# Altium PCB XEM7310_Berakout.PcbDoc (part 1 of 3)
Units mil, origin at the board's own origin, x right, y up, seen from the top; angles counter-clockwise.
Board outline 5980 x 6510 mil, 4 copper layers (Top, Ground Plane, Power Plane, Bottom), stack 61.496 mil thick; 68 components, 204 nets, 832 pads, 382 vias.
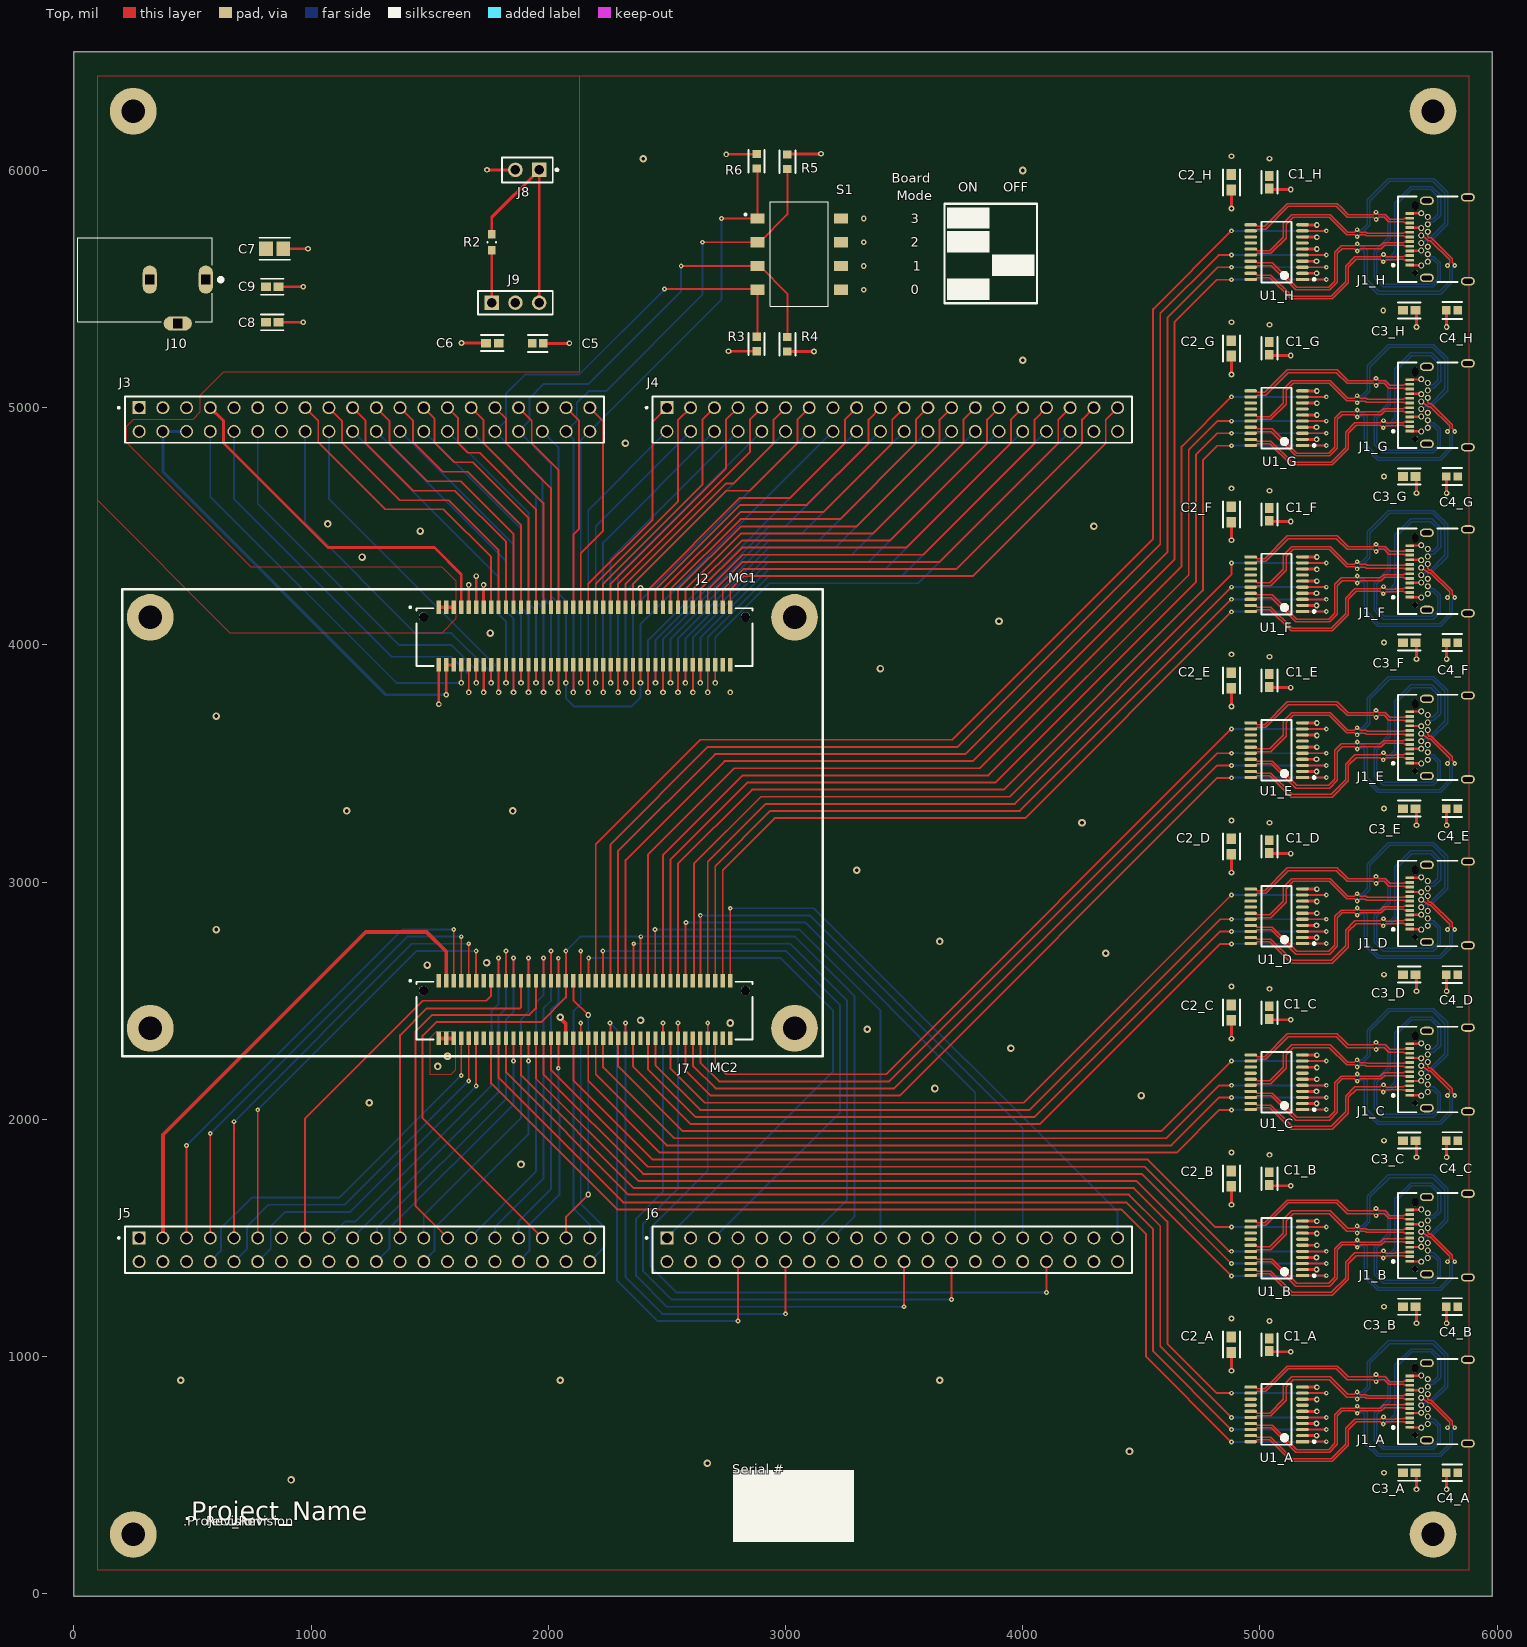
[diagram p0: Top view]
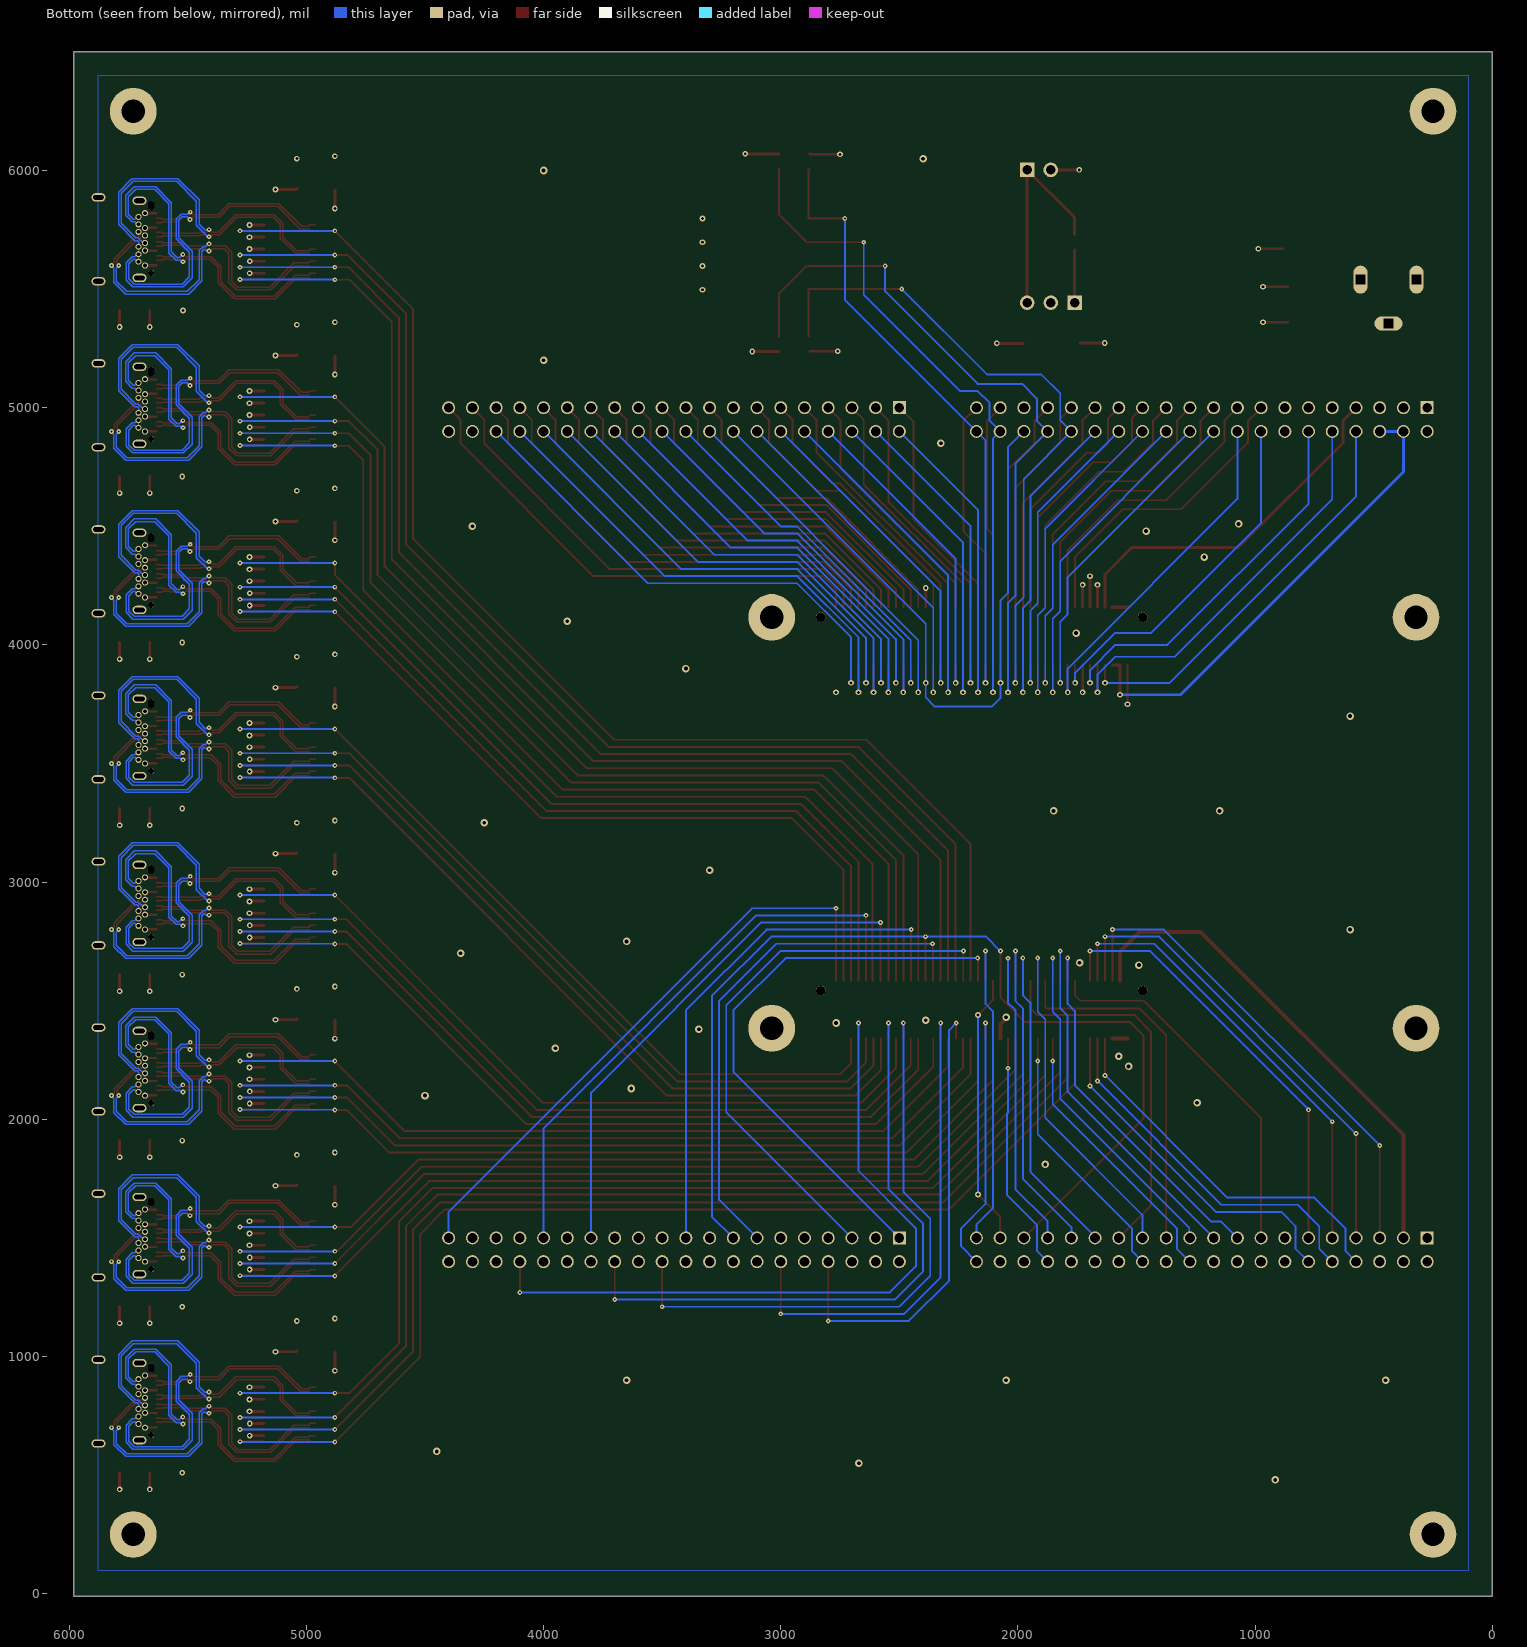
[diagram p1: Bottom view, seen from below]
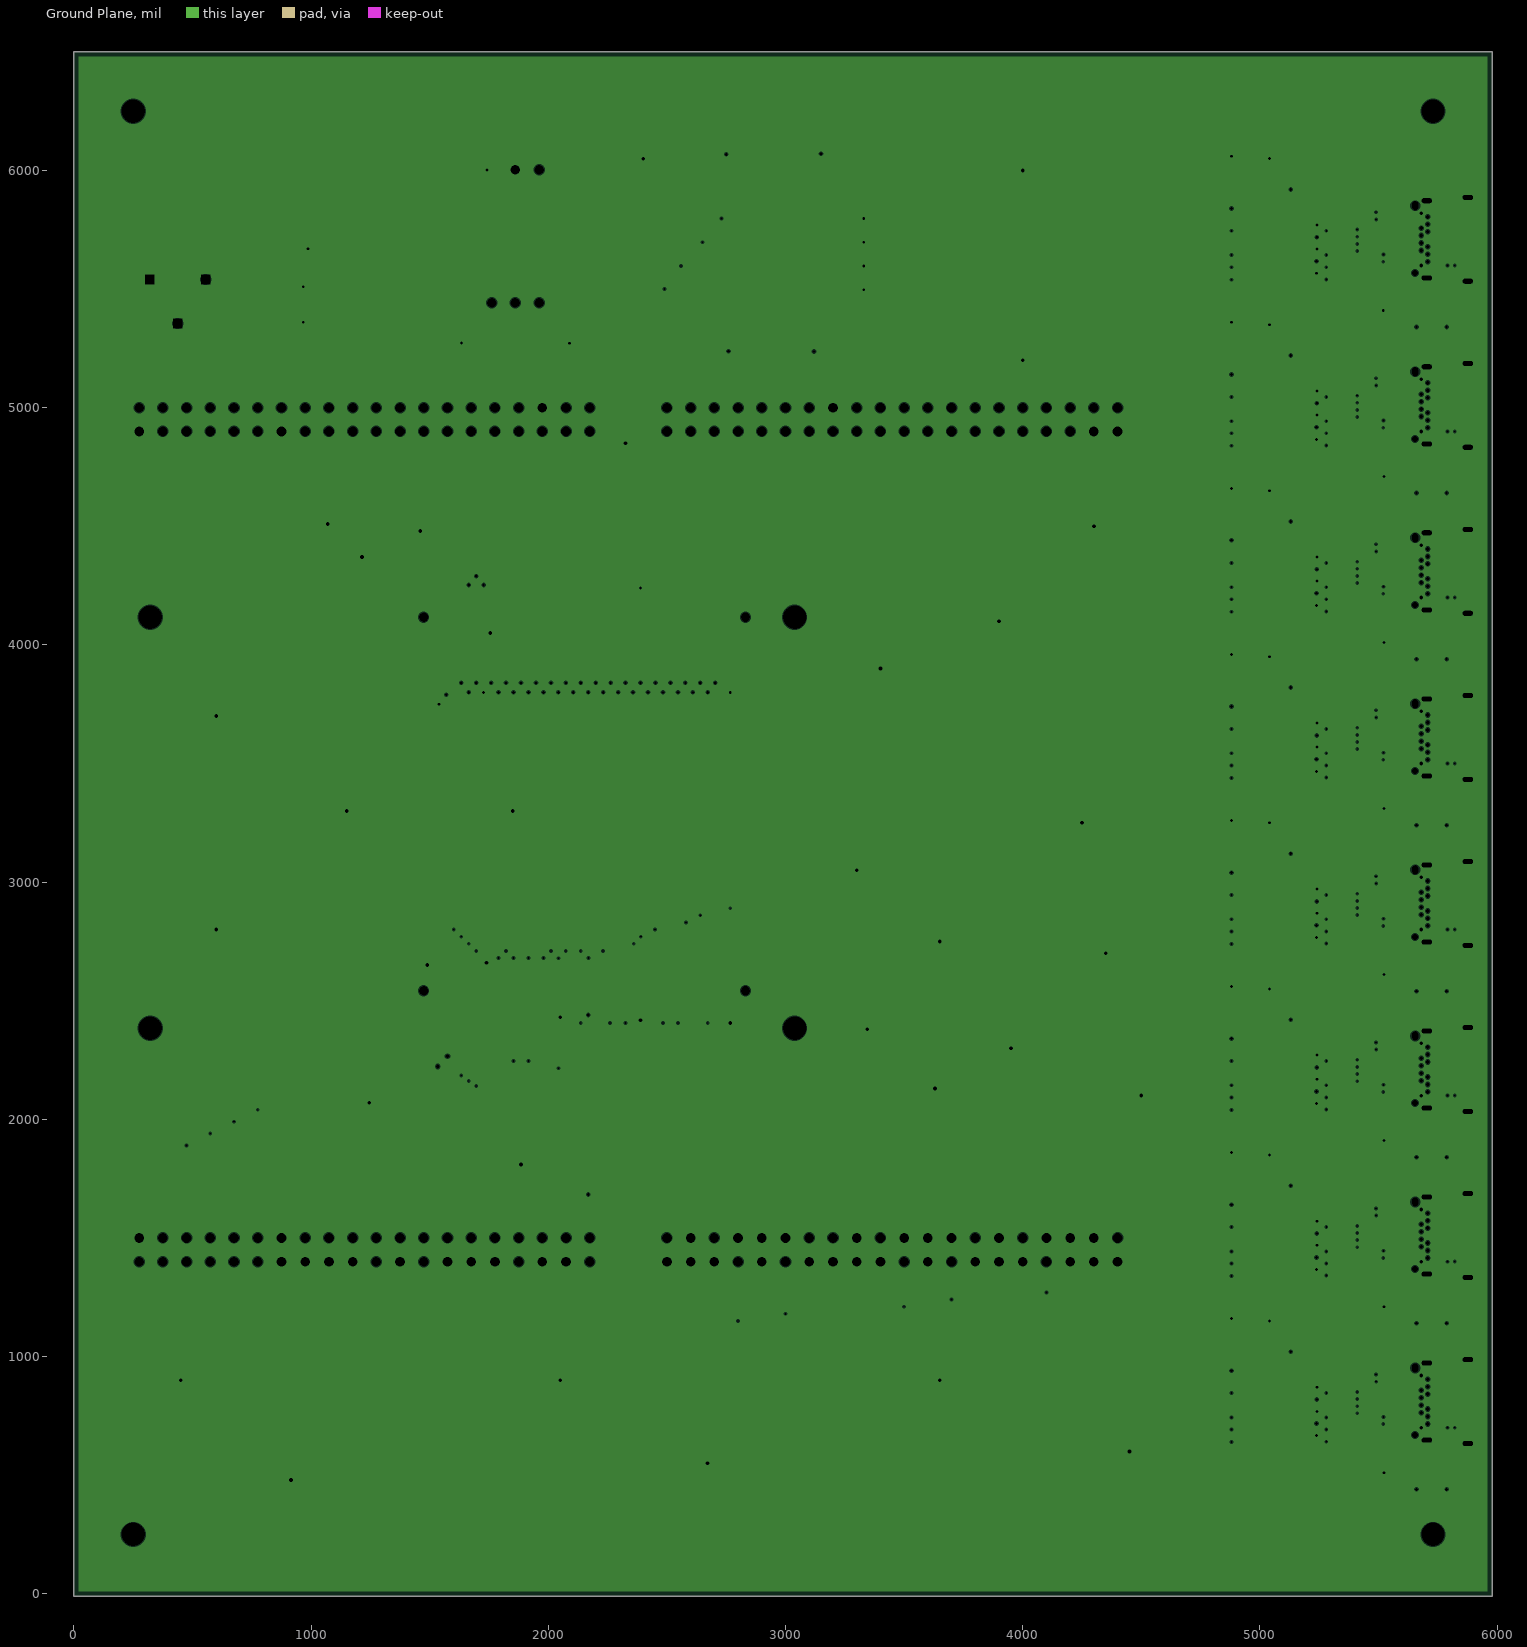
[diagram p2: Ground Plane, clearances drawn from the general rule]
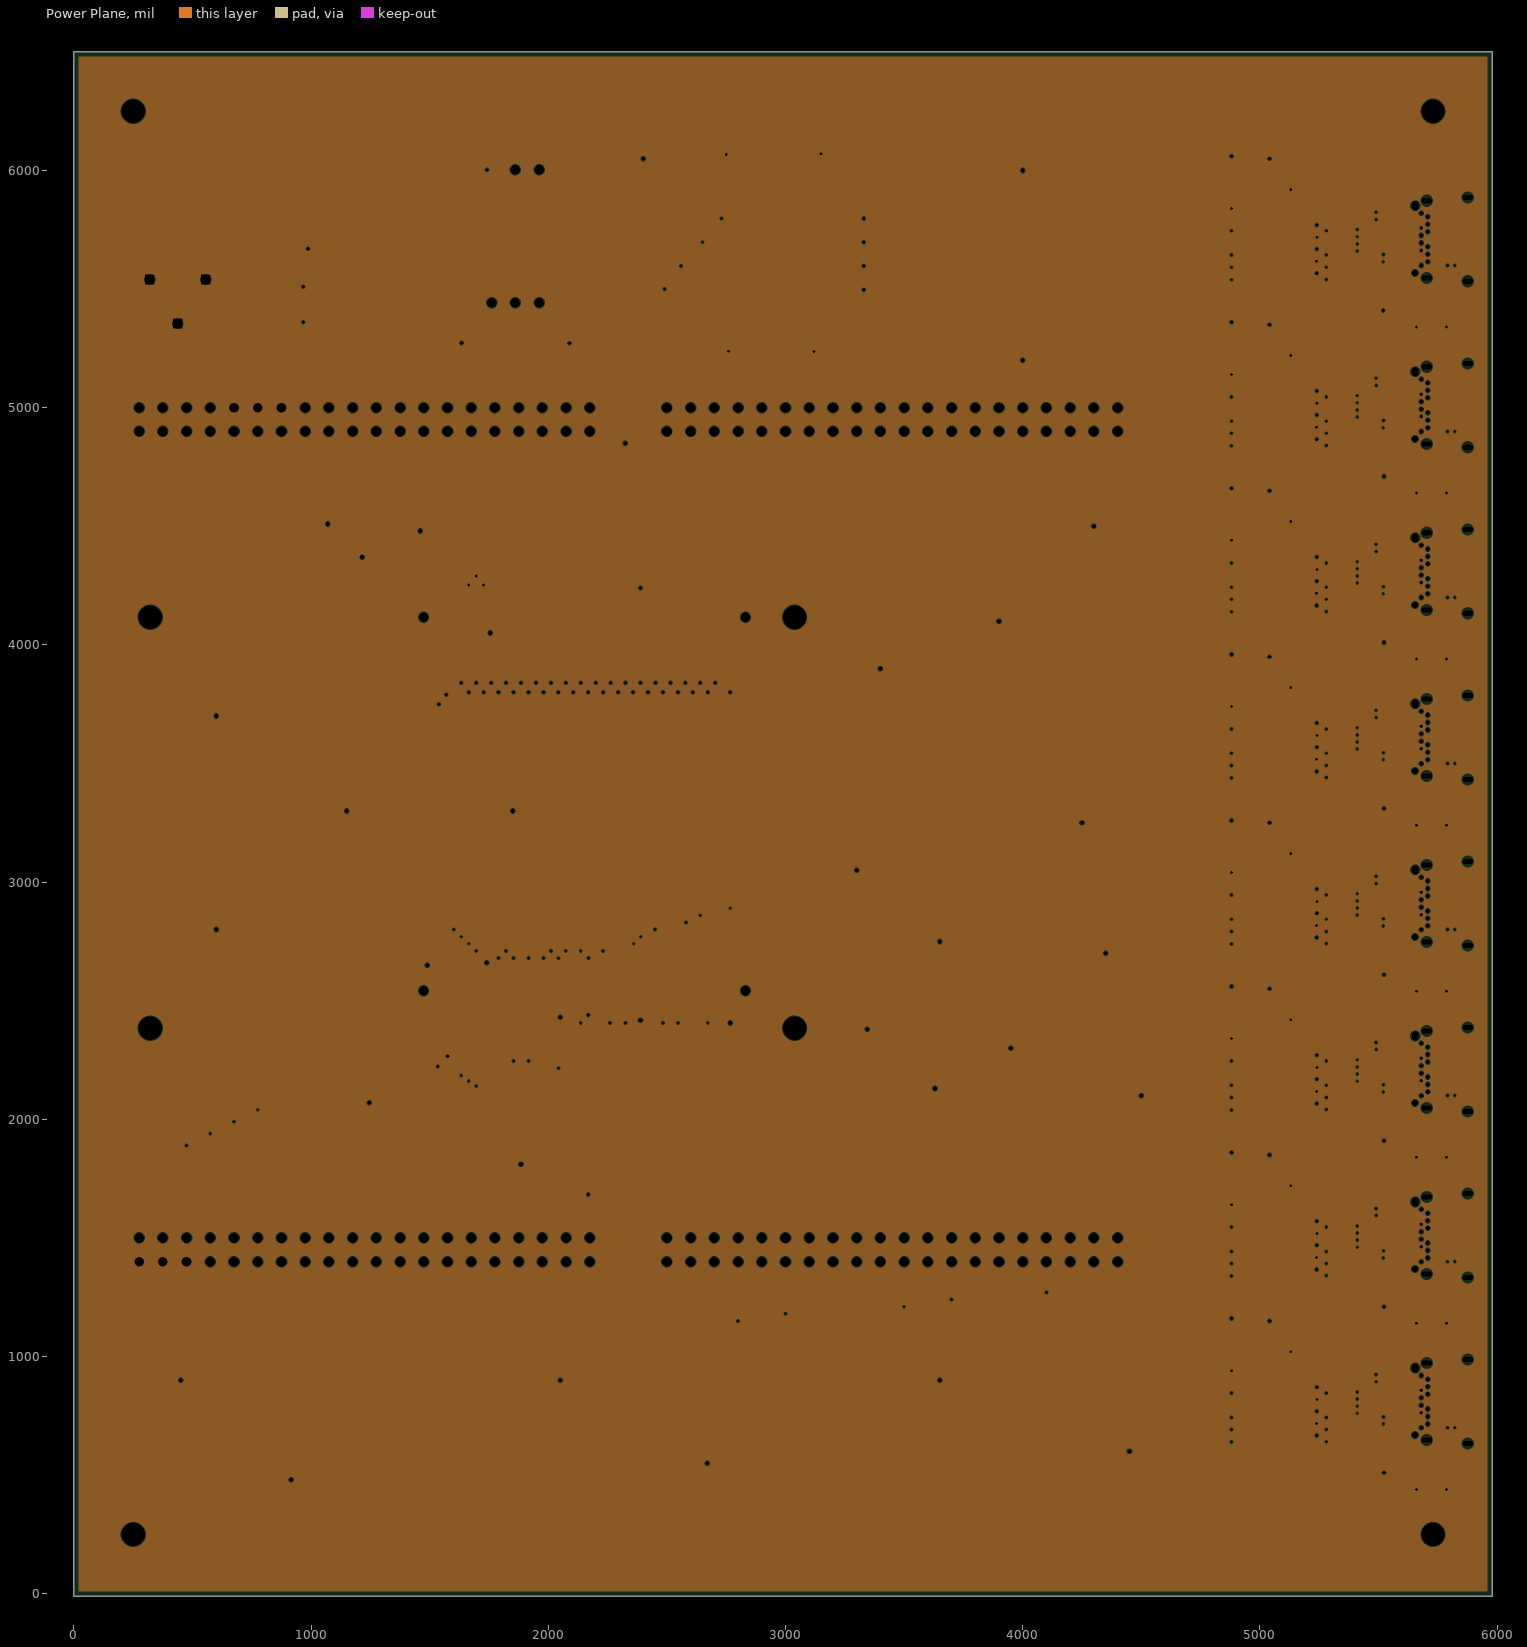
[diagram p3: Power Plane, clearances drawn from the general rule]

## Layer stack, top to bottom
Top Solder: solder mask 0.4, Solder Resist, Dk 3.5
Top: signal copper 1.378
Dielectric 1: prepreg 7.7165, FR-4, Dk 4.74
Ground Plane: plane copper 1.378, net GND
Dielectric 3: core 40.5512, Dk 4.6
Power Plane: plane copper 1.378, net 3V3
Dielectric 4: prepreg 7.7165, Dk 4.74
Bottom: signal copper 1.378
Bottom Solder: solder mask 0.4, Solder Resist, Dk 3.5

## Board outline
0,6500 5980,6500 5980,-10 0,-10

## Design rules (kind name [scope] priority, off if disabled: settings)
AssemblyTestPointUsage [All] p0: scope1count=1 scope1_0_kind=Board scope1_0_value=Board scope2count=1 scope2_0_kind=Board scope2_0_value=Board commentlength=0
AssemblyTestpoint [All] p0: scope1count=1 scope1_0_kind=Board scope1_0_value=Board scope2count=1 scope2_0_kind=Board scope2_0_value=Board commentlength=0
BoardOutlineClearance [All] p0: scope1count=1 scope1_0_kind=Board scope1_0_value=Board scope2count=1 scope2_0_kind=Board scope2_0_value=Board commentlength=0 gap=7.87
BoardOutlineClearance [All] p1: gap=7.87 ignorepadtopadclearanceinfootprint=FALSE
Clearance Clearance_1 [All] p0: scope1count=1 scope1_0_kind=ComponentClass scope1_0_value=USB scope2count=1 scope2_0_kind=ComponentClass scope2_0_value=USB commentlength=0 gap=4
Clearance Diff_Clearance [All] p0 off: scope1count=1 scope1_0_kind=Board scope1_0_value=Board scope2count=1 scope2_0_kind=Board scope2_0_value=Board commentlength=74 gap=10 // Protel DXP Scope 2 Expression Was: InDifferentialPairClass('LVDS_SPI')
Clearance [All] p0: scope1count=1 scope1_0_kind=Board scope1_0_value=Board scope2count=1 scope2_0_kind=Board scope2_0_value=Board commentlength=0 gap=6
Clearance Clearance_1 [InComponentClass('USB') vs InComponentClass('USB')] p1: gap=4 ignorepadtopadclearanceinfootprint=TRUE
Clearance Diff_Clearance [InDifferentialPairClass('LVDS_SPI') vs InDifferentialPairClass('LVDS_SPI')] p2: gap=10 ignorepadtopadclearanceinfootprint=TRUE except(5: Arc-Arc Arc-Track Track-Track)
Clearance [All] p3: gap=6 ignorepadtopadclearanceinfootprint=TRUE except(10: Arc-Arc Arc-Track Arc-Fill Arc-Poly Arc-Region Track-Track Track-Fill Track-Poly Track-Region SMDPad-Fill SMDPad-Poly SMDPad-Region THPad-Fill THPad-Poly THPad-Region Via-Fill Via-Poly Via-Region Fill-Fill Fill-Poly Fill-Region Poly-Poly Poly-Region Region-Region)
ComponentClearance [All] p0: scope1count=1 scope1_0_kind=Board scope1_0_value=Board scope2count=1 scope2_0_kind=Board scope2_0_value=Board commentlength=0 gap=10 collisioncheckmode=3
ComponentClearance [All] p1: gap=10 collisioncheckmode=3 verticalgap=10 showdistances=TRUE
DiffPairsRouting [All] p0 off: scope1count=1 scope1_0_kind=Board scope1_0_value=Board scope2count=1 scope2_0_kind=Board scope2_0_value=Board commentlength=74 // Protel DXP Scope 1 Expression Was: InDifferentialPairClass('LVDS_SPI')
DiffPairsRouting [InDifferentialPairClass('LVDS_SPI')] p1: maxlimit=5 minlimit=5 mostfreqgap=5 toplayer_minwidth=6.3 toplayer_maxwidth=6.3 toplayer_prefwidth=6.3 bottomlayer_minwidth=6.3 bottomlayer_maxwidth=6.3 bottomlayer_prefwidth=6.3 impedanceprofiledriven=TRUE impedanceprofileid={1ED248B1-CE5C-4CD3-9082-4E048037D57D} impedanceprofilevalue=100.000000 maxuncoupledlength=30
FabricationTestPointUsage [All] p0: scope1count=1 scope1_0_kind=Board scope1_0_value=Board scope2count=1 scope2_0_kind=Board scope2_0_value=Board commentlength=0 valid=0 allowmultiple=FALSE
FabricationTestpoint [All] p0: scope1count=1 scope1_0_kind=Board scope1_0_value=Board scope2count=1 scope2_0_kind=Board scope2_0_value=Board commentlength=0 side=3 testpointundercomponent=TRUE minsize=40 maxsize=100 preferedsize=60 minholesize=0 maxholesize=40 preferedholesize=32 testpointgrid=1
FanoutControl Fanout_Default [All] p0: scope1count=1 scope1_0_kind=Board scope1_0_value=Board scope2count=1 scope2_0_kind=Board scope2_0_value=Board commentlength=30 // Fanout_Default (Default Rule)
FanoutControl Fanout_Small [All] p0 off: scope1count=1 scope1_0_kind=Board scope1_0_value=Board scope2count=1 scope2_0_kind=Board scope2_0_value=Board commentlength=84 // Protel DXP Scope 1 Expression Was: (CompPinCount < 5)   Fanout_Small (Default Rule)
FanoutControl Fanout_SOIC [All] p0 off: scope1count=1 scope1_0_kind=Board scope1_0_value=Board scope2count=1 scope2_0_kind=Board scope2_0_value=Board commentlength=71 // Protel DXP Scope 1 Expression Was: IsSOIC   Fanout_SOIC (Default Rule)
FanoutControl Fanout_LCC [All] p0 off: scope1count=1 scope1_0_kind=Board scope1_0_value=Board scope2count=1 scope2_0_kind=Board scope2_0_value=Board commentlength=69 // Protel DXP Scope 1 Expression Was: IsLCC   Fanout_LCC (Default Rule)
FanoutControl Fanout_BGA [All] p0 off: scope1count=1 scope1_0_kind=Board scope1_0_value=Board scope2count=1 scope2_0_kind=Board scope2_0_value=Board commentlength=69 // Protel DXP Scope 1 Expression Was: IsBGA   Fanout_BGA (Default Rule)
Height [All] p0: scope1count=1 scope1_0_kind=Board scope1_0_value=Board scope2count=1 scope2_0_kind=Board scope2_0_value=Board commentlength=0
Height [All] p1: minheight=0 maxheight=71497.94 prefheight=500
HoleSize [All] p0: scope1count=1 scope1_0_kind=Board scope1_0_value=Board scope2count=1 scope2_0_kind=Board scope2_0_value=Board commentlength=0 absolutevalues=TRUE maxlimit=248.03 minlimit=7.87 maxpercent=80.000 minpercent=20.000
HoleSize [All] p1: absolutevalues=TRUE maxlimit=248.03 minlimit=7.87 maxpercent=80.000 minpercent=20.000
HoleToHoleClearance [All] p0: scope1count=1 scope1_0_kind=Board scope1_0_value=Board scope2count=1 scope2_0_kind=Board scope2_0_value=Board commentlength=0
HoleToHoleClearance [All] p1: gap=10 allowstackedmicrovias=FALSE
LayerPairs [All] p0: scope1count=1 scope1_0_kind=Board scope1_0_value=Board scope2count=1 scope2_0_kind=Board scope2_0_value=Board commentlength=0 enforce=TRUE
Length [All] p0 off: scope1count=1 scope1_0_kind=Board scope1_0_value=Board scope2count=1 scope2_0_kind=Board scope2_0_value=Board commentlength=74 maxlimit=100000 minlimit=10 // Protel DXP Scope 1 Expression Was: InDifferentialPairClass('LVDS_SPI')
Length [InDifferentialPairClass('LVDS_SPI')] p1: maxlimit=100000 minlimit=10
MinimumAnnularRing USB_TH [All] p0: scope1count=1 scope1_0_kind=ComponentClass scope1_0_value=USB scope2count=1 scope2_0_kind=Board scope2_0_value=Board commentlength=0 minimumring=4
MinimumAnnularRing [All] p0: scope1count=1 scope1_0_kind=Board scope1_0_value=Board scope2count=1 scope2_0_kind=Board scope2_0_value=Board commentlength=0 minimumring=6
MinimumAnnularRing USB_TH [InComponentClass('USB')] p1: minimumring=4
MinimumAnnularRing [All] p2: minimumring=6
MinimumSolderMaskSliver MinimumSolderMaskSliver_1 [All] p0: scope1count=1 scope1_0_kind=ComponentClass scope1_0_value=USB scope2count=1 scope2_0_kind=ComponentClass scope2_0_value=USB commentlength=0
MinimumSolderMaskSliver [All] p0: scope1count=1 scope1_0_kind=Board scope1_0_value=Board scope2count=1 scope2_0_kind=Board scope2_0_value=Board commentlength=0
MinimumSolderMaskSliver MinimumSolderMaskSliver_1 [InComponentClass('USB') vs InComponentClass('USB')] p1: minsoldermaskwidth=5
MinimumSolderMaskSliver [All] p2: minsoldermaskwidth=6
NetAntennae [All] p0: scope1count=1 scope1_0_kind=Board scope1_0_value=Board scope2count=1 scope2_0_kind=Board scope2_0_value=Board commentlength=0
PasteMaskExpansion [All] p0: scope1count=1 scope1_0_kind=Board scope1_0_value=Board scope2count=1 scope2_0_kind=Board scope2_0_value=Board commentlength=0 expansion=0
PlaneClearance [All] p0: scope1count=1 scope1_0_kind=Board scope1_0_value=Board scope2count=1 scope2_0_kind=Board scope2_0_value=Board commentlength=0 clearance=4
PlaneClearance [All] p1: clearance=4
PlaneConnect [All] p0: scope1count=1 scope1_0_kind=Board scope1_0_value=Board scope2count=1 scope2_0_kind=Board scope2_0_value=Board commentlength=0 planeconnectstyle=Relief reliefexpansion=11.81 reliefentries=4 reliefconductorwidth=4 reliefairgap=4
PlaneConnect PlaneConnectPowerPads [All] p0: scope1count=1 scope1_0_kind=PadClass scope1_0_value=PowerPads scope2count=1 scope2_0_kind=Board scope2_0_value=Board commentlength=0 planeconnectstyle=Direct reliefexpansion=20 reliefentries=4 reliefconductorwidth=10 reliefairgap=10
PlaneConnect PlaneConnectPowerPads [InPadClass('PowerPads')] p1: planeconnectstyle=Direct reliefexpansion=20 reliefentries=4 reliefconductorwidth=10 reliefairgap=10
PlaneConnect [All] p2: pad.planeconnectstyle=Relief pad.reliefexpansion=11.81 pad.reliefentries=4 pad.reliefconductorwidth=4 pad.reliefairgap=4 via.planeconnectstyle=Direct via.reliefexpansion=11.81 via.reliefentries=4 via.reliefconductorwidth=5 via.reliefairgap=5
PolygonConnect [All] p0: scope1count=1 scope1_0_kind=Board scope1_0_value=Board scope2count=1 scope2_0_kind=Board scope2_0_value=Board commentlength=0 connectstyle=Relief reliefconductorwidth=10 reliefentries=4 polygonreliefangle="90 Angle"
PolygonConnect PolygonConnectPowerPads [All] p0 off: scope1count=1 scope1_0_kind=Board scope1_0_value=Board scope2count=1 scope2_0_kind=Board scope2_0_value=Board commentlength=64 connectstyle=Direct reliefconductorwidth=10 reliefentries=4 polygonreliefangle="90 Angle" // Protel DXP Scope 2 Expression Was: (InPadClass('PowerPads'))
PolygonConnect PolygonConnectPowerPads [All vs (InPadClass('PowerPads'))] p1: connectstyle=Direct reliefconductorwidth=10 reliefentries=4 polygonreliefangle="90 Angle" airgapwidth=10
PolygonConnect [All] p2: thpad.connectstyle=Relief thpad.reliefconductorwidth=10 thpad.reliefentries=4 thpad.polygonreliefangle="90 Angle" thpad.airgapwidth=8 smdpad.connectstyle=Relief smdpad.reliefconductorwidth=10 smdpad.reliefentries=4 smdpad.polygonreliefangle="90 Angle" smdpad.airgapwidth=8 via.connectstyle=Direct via.reliefconductorwidth=5 via.reliefentries=4 via.polygonreliefangle="90 Angle" via.airgapwidth=5
RoutingCorners [All] p0: scope1count=1 scope1_0_kind=Board scope1_0_value=Board scope2count=1 scope2_0_kind=Board scope2_0_value=Board commentlength=0 cornerstyle=45-Degree minsetback=100 maxsetback=100
RoutingLayers [All] p0: scope1count=1 scope1_0_kind=Board scope1_0_value=Board scope2count=1 scope2_0_kind=Board scope2_0_value=Board commentlength=0 top layer=Automatic bottom layer=Automatic
RoutingPriority [All] p0: scope1count=1 scope1_0_kind=Board scope1_0_value=Board scope2count=1 scope2_0_kind=Board scope2_0_value=Board commentlength=0
RoutingTopology [All] p0: scope1count=1 scope1_0_kind=Board scope1_0_value=Board scope2count=1 scope2_0_kind=Board scope2_0_value=Board commentlength=0 topology=Shortest
RoutingVias Diff_Vias [All] p0 off: scope1count=1 scope1_0_kind=Board scope1_0_value=Board scope2count=1 scope2_0_kind=Board scope2_0_value=Board commentlength=74 holewidth=8 width=18 viastyle="Through Hole" minholewidth=8 minwidth=18 maxholewidth=8 maxwidth=18 // Protel DXP Scope 1 Expression Was: InDifferentialPairClass('LVDS_SPI')
RoutingVias [All] p0: scope1count=1 scope1_0_kind=Board scope1_0_value=Board scope2count=1 scope2_0_kind=Board scope2_0_value=Board commentlength=0 holewidth=12 width=24 viastyle="Through Hole" minholewidth=10 minwidth=20 maxholewidth=16 maxwidth=32
RoutingVias Diff_Vias [InDifferentialPairClass('LVDS_SPI')] p1: holewidth=8 width=18 viastyle="Through Hole" minholewidth=8 minwidth=18 maxholewidth=8 maxwidth=18
RoutingVias [All] p2: holewidth=12 width=24 viastyle="Through Hole" minholewidth=10 minwidth=20 maxholewidth=16 maxwidth=32
ShortCircuit [All] p0: scope1count=1 scope1_0_kind=Board scope1_0_value=Board scope2count=1 scope2_0_kind=Board scope2_0_value=Board commentlength=0 allowed=FALSE
SilkToBoardRegionClearance [All] p0: scope1count=1 scope1_0_kind=Board scope1_0_value=Board scope2count=1 scope2_0_kind=Board scope2_0_value=Board commentlength=0
SilkToSilkClearance [All] p0: scope1count=1 scope1_0_kind=Board scope1_0_value=Board scope2count=1 scope2_0_kind=Board scope2_0_value=Board commentlength=0
SilkToSilkClearance [All] p1: silktosilkclearance=5
SilkToSolderMaskClearance [All] p0 off: scope1count=1 scope1_0_kind=Board scope1_0_value=Board scope2count=1 scope2_0_kind=Board scope2_0_value=Board commentlength=44 // Protel DXP Scope 1 Expression Was: IsPad
SilkToSolderMaskClearance [IsPad] p1: minsilkscreentomaskgap=5 clearancetoexposedcopper=TRUE
SolderMaskExpansion [All] p0: scope1count=1 scope1_0_kind=Board scope1_0_value=Board scope2count=1 scope2_0_kind=Board scope2_0_value=Board commentlength=0 expansion=3
SolderMaskExpansion [All] p1: expansion=3 istentingtop=FALSE
SupplyNets "Schematic Supply Nets_7" [All] p0: scope1count=1 scope1_0_kind=Net scope1_0_value=1V0 scope2count=1 scope2_0_kind=Board scope2_0_value=Board commentlength=0 voltage=0.000
SupplyNets "Schematic Supply Nets_6" [All] p0: scope1count=1 scope1_0_kind=Net scope1_0_value=5V0 scope2count=1 scope2_0_kind=Board scope2_0_value=Board commentlength=0 voltage=0.000
SupplyNets "Schematic Supply Nets_5" [All] p0: scope1count=1 scope1_0_kind=Net scope1_0_value=VCCO_MC2 scope2count=1 scope2_0_kind=Board scope2_0_value=Board commentlength=0 voltage=0.000
SupplyNets "Schematic Supply Nets_4" [All] p0: scope1count=1 scope1_0_kind=Net scope1_0_value=VCCO_MC1 scope2count=1 scope2_0_kind=Board scope2_0_value=Board commentlength=0 voltage=0.000
SupplyNets "Schematic Supply Nets_3" [All] p0: scope1count=1 scope1_0_kind=Net scope1_0_value=1V8 scope2count=1 scope2_0_kind=Board scope2_0_value=Board commentlength=0 voltage=0.000
SupplyNets "Schematic Supply Nets_2" [All] p0: scope1count=1 scope1_0_kind=Net scope1_0_value=3V3 scope2count=1 scope2_0_kind=Board scope2_0_value=Board commentlength=0 voltage=0.000
SupplyNets "Schematic Supply Nets_1" [All] p0: scope1count=1 scope1_0_kind=Net scope1_0_value=GND scope2count=1 scope2_0_kind=Board scope2_0_value=Board commentlength=0 voltage=0.000
SupplyNets "Schematic Supply Nets_7" [InNet('1V0')] p1: voltage=0.000
SupplyNets "Schematic Supply Nets_6" [InNet('5V0')] p2: voltage=0.000
SupplyNets "Schematic Supply Nets_5" [InNet('VCCO_MC2')] p3: voltage=0.000
SupplyNets "Schematic Supply Nets_4" [InNet('VCCO_MC1')] p4: voltage=0.000
SupplyNets "Schematic Supply Nets_3" [InNet('1V8')] p5: voltage=0.000
SupplyNets "Schematic Supply Nets_2" [InNet('3V3')] p6: voltage=0.000
SupplyNets "Schematic Supply Nets_1" [InNet('GND')] p7: voltage=0.000
UnRoutedNet [All] p0: scope1count=1 scope1_0_kind=Board scope1_0_value=Board scope2count=1 scope2_0_kind=Board scope2_0_value=Board commentlength=0
UnRoutedNet [All] p1: checkbadconnections=TRUE
UnpouredPolygon [All] p0: scope1count=1 scope1_0_kind=Board scope1_0_value=Board scope2count=1 scope2_0_kind=Board scope2_0_value=Board commentlength=0
Width 5V0_Width [All] p0: scope1count=1 scope1_0_kind=Net scope1_0_value=5V0 scope2count=1 scope2_0_kind=Board scope2_0_value=Board commentlength=0 maxlimit=100 minlimit=10 preferedwidth=20
Width General [All] p0: scope1count=1 scope1_0_kind=NetClass scope1_0_value=SE_Signals scope2count=1 scope2_0_kind=Board scope2_0_value=Board commentlength=0 maxlimit=20 minlimit=5 preferedwidth=8
Width GND_Width [All] p0: scope1count=1 scope1_0_kind=Net scope1_0_value=GND scope2count=1 scope2_0_kind=Board scope2_0_value=Board commentlength=0 maxlimit=100 minlimit=10 preferedwidth=20
Width 3V3_Width [All] p0: scope1count=1 scope1_0_kind=Net scope1_0_value=3V3 scope2count=1 scope2_0_kind=Board scope2_0_value=Board commentlength=0 maxlimit=100 minlimit=10 preferedwidth=20
Width 5V0_Width [InNet('5V0')] p1: maxlimit=100 minlimit=10 preferedwidth=20 minimp=50.000000 maximp=50.000000 favimp=50.000000
Width General [InNetClass('SE_Signals')] p2: maxlimit=20 minlimit=5 preferedwidth=8 minimp=50.000000 maximp=50.000000 favimp=50.000000
Width 3V3_Width [InNet('3V3')] p3: maxlimit=100 minlimit=10 preferedwidth=20
Width GND_Width [InNet('GND')] p4: maxlimit=100 minlimit=10 preferedwidth=20 minimp=50.000000 maximp=50.000000 favimp=50.000000
19 further rules are at their usual default settings.

## Classes and differential pairs
component class USB: J1_A J1_B J1_C J1_D J1_E J1_F J1_G J1_H
net class USB_TH: 3V3 C\S\_A_N C\S\_A_P C\S\_B_N C\S\_B_P C\S\_C_N C\S\_C_P C\S\_D_N C\S\_D_P C\S\_E_N C\S\_E_P C\S\_F_N C\S\_F_P C\S\_G_N C\S\_G_P C\S\_H_N C\S\_H_P GND MISO_A_N MISO_A_P MISO_B_N MISO_B_P MISO_C_N MISO_C_P MISO_D_N MISO_D_P MISO_E_N MISO_E_P MISO_F_N MISO_F_P MISO_G_N MISO_G_P MISO_H_N MISO_H_P MOSI_A_N MOSI_A_P MOSI_B_N MOSI_B_P MOSI_C_N MOSI_C_P MOSI_D_N MOSI_D_P MOSI_E_N MOSI_E_P MOSI_F_N MOSI_F_P MOSI_G_N MOSI_G_P MOSI_H_N MOSI_H_P SCLK_A_N SCLK_A_P SCLK_B_N SCLK_B_P SCLK_C_N SCLK_C_P SCLK_D_N SCLK_D_P SCLK_E_N SCLK_E_P SCLK_F_N SCLK_F_P SCLK_G_N SCLK_G_P SCLK_H_N SCLK_H_P
net class SE_Signals: board_mode_0 board_mode_1 board_mode_2 board_mode_3 C\S\_A C\S\_B C\S\_C C\S\_D C\S\_E C\S\_F C\S\_G C\S\_H FPGA_TCK FPGA_TDI FPGA_TDO FPGA_TMS MC1_15 MC1_16 MC1_17 MC1_18 MC1_19 MC1_20 MC1_21 MC1_22 MC1_23 MC1_24 MC1_25 MC1_26 MC1_27 MC1_28 MC1_29 MC1_30 MC1_31 MC1_33 MC1_37 MC1_39 MC1_41 MC1_42 MC1_43 MC1_44 MC1_45 MC1_46 MC1_47 MC1_48 MC1_49 MC1_50 MC1_51 MC1_52 MC1_53 MC1_54 MC1_57 MC1_58 MC1_59 MC1_60 MC1_61 MC1_62 MC1_63 MC1_64 MC1_65 MC1_66 MC1_67 MC1_68 MC1_69 MC1_70 MC1_72 MC1_74 MC1_76 MC1_77 MC1_79 MC2_10 MC2_12 MC2_15 MC2_17 MC2_19 MC2_21 MC2_22 MC2_23 MC2_25 MC2_27 MC2_29 MC2_31 MC2_33 MC2_34 MC2_37 MC2_39 MC2_45 MC2_48 MC2_59 MC2_62 MC2_71 MC2_74 MISO_A2 MISO_B2 MISO_C2 MISO_D2 MISO_E2 MISO_F2 MISO_G2 MISO_H2 MOSI_A MOSI_B MOSI_C MOSI_D MOSI_E MOSI_F MOSI_G MOSI_H NetJ8_1 NetJ9_1 SCLK_A SCLK_B SCLK_C SCLK_D SCLK_E SCLK_F SCLK_G SCLK_H status_led_1 status_led_2 status_led_3 SYS_CLK_MC1 SYS_CLK_MC2 XADC_VN XADC_VP
channel class Intan_Interface: A B C D E F G H
component class U_Onboard_IO: C5 C6 C7 C8 C9 J8 J9 J10 R2 R3 R4 R5 R6 S1
component class U_FPGA: J2 J3 J4 J5 J6 J7
component class H: C1_H C2_H C3_H C4_H J1_H U1_H
component class G: C1_G C2_G C3_G C4_G J1_G U1_G
component class F: C1_F C2_F C3_F C4_F J1_F U1_F
component class E: C1_E C2_E C3_E C4_E J1_E U1_E
component class D: C1_D C2_D C3_D C4_D J1_D U1_D
component class C: C1_C C2_C C3_C C4_C J1_C U1_C
component class B: C1_B C2_B C3_B C4_B J1_B U1_B
component class A: C1_A C2_A C3_A C4_A J1_A U1_A
differential pair SCLK_H: +SCLK_H_P -SCLK_H_N
differential pair SCLK_G: +SCLK_G_P -SCLK_G_N
differential pair SCLK_F: +SCLK_F_P -SCLK_F_N
differential pair SCLK_E: +SCLK_E_P -SCLK_E_N
differential pair SCLK_D: +SCLK_D_P -SCLK_D_N
differential pair SCLK_C: +SCLK_C_P -SCLK_C_N
differential pair SCLK_B: +SCLK_B_P -SCLK_B_N
differential pair SCLK_A: +SCLK_A_P -SCLK_A_N
differential pair MOSI_H: +MOSI_H_P -MOSI_H_N
differential pair MOSI_G: +MOSI_G_P -MOSI_G_N
differential pair MOSI_F: +MOSI_F_P -MOSI_F_N
differential pair MOSI_E: +MOSI_E_P -MOSI_E_N
differential pair MOSI_D: +MOSI_D_P -MOSI_D_N
differential pair MOSI_C: +MOSI_C_P -MOSI_C_N
differential pair MOSI_B: +MOSI_B_P -MOSI_B_N
differential pair MOSI_A: +MOSI_A_P -MOSI_A_N
differential pair MISO_H: +MISO_H_P -MISO_H_N
differential pair MISO_G: +MISO_G_P -MISO_G_N
differential pair MISO_F: +MISO_F_P -MISO_F_N
differential pair MISO_E: +MISO_E_P -MISO_E_N
differential pair MISO_D: +MISO_D_P -MISO_D_N
differential pair MISO_C: +MISO_C_P -MISO_C_N
differential pair MISO_B: +MISO_B_P -MISO_B_N
differential pair MISO_A: +MISO_A_P -MISO_A_N
differential pair C\S\_H: +C\S\_H_P -C\S\_H_N
differential pair C\S\_G: +C\S\_G_P -C\S\_G_N
differential pair C\S\_F: +C\S\_F_P -C\S\_F_N
differential pair C\S\_E: +C\S\_E_P -C\S\_E_N
differential pair C\S\_D: +C\S\_D_P -C\S\_D_N
differential pair C\S\_C: +C\S\_C_P -C\S\_C_N
differential pair C\S\_B: +C\S\_B_P -C\S\_B_N
differential pair " ": +C\S\_A_P -C\S\_A_N

## Components (designator, comment, footprint, x,y, rotation, side; value= is the part's Value field where it differs from the comment)
C1_A "0.1uF" FP-CC0603-DA-IPC_B 5040,1050 r90 top (schematic designator C1)
C1_B "0.1uF" FP-CC0603-DA-IPC_B 5040,1750 r90 top (schematic designator C1)
C1_C "0.1uF" FP-CC0603-DA-IPC_B 5040,2450 r90 top (schematic designator C1)
C1_D "0.1uF" FP-CC0603-DA-IPC_B 5040,3150 r90 top (schematic designator C1)
C1_E "0.1uF" FP-CC0603-DA-IPC_B 5040,3850 r90 top (schematic designator C1)
C1_F "0.1uF" FP-CC0603-DA-IPC_B 5040,4550 r90 top (schematic designator C1)
C1_G "0.1uF" FP-CC0603-DA-IPC_B 5040,5250 r90 top (schematic designator C1)
C1_H "0.1uF" FP-CC0603-DA-IPC_B 5040,5950 r90 top (schematic designator C1)
C2_A "1nF" FP-CL10-IPC_A 4880,1050 r270 top (schematic designator C2)
C2_B "1nF" FP-CL10-IPC_A 4880,1750 r270 top (schematic designator C2)
C2_C "1nF" FP-CL10-IPC_A 4880,2450 r270 top (schematic designator C2)
C2_D "1nF" FP-CL10-IPC_A 4880,3150 r270 top (schematic designator C2)
C2_E "1nF" FP-CL10-IPC_A 4880,3850 r270 top (schematic designator C2)
C2_F "1nF" FP-CL10-IPC_A 4880,4550 r270 top (schematic designator C2)
C2_G "1nF" FP-CL10-IPC_A 4880,5250 r270 top (schematic designator C2)
C2_H "1nF" FP-CL10-IPC_A 4880,5950 r270 top (schematic designator C2)
C3_A "0.1uF" FP-CC0603-DA-IPC_B 5630,510 r180 top (schematic designator C3)
C3_B "0.1uF" FP-CC0603-DA-IPC_B 5630,1210 r180 top (schematic designator C3)
C3_C "0.1uF" FP-CC0603-DA-IPC_B 5630,1910 r180 top (schematic designator C3)
C3_D "0.1uF" FP-CC0603-DA-IPC_B 5630,2610 r180 top (schematic designator C3)
C3_E "0.1uF" FP-CC0603-DA-IPC_B 5630,3310 r180 top (schematic designator C3)
C3_F "0.1uF" FP-CC0603-DA-IPC_B 5630,4010 r180 top (schematic designator C3)
C3_G "0.1uF" FP-CC0603-DA-IPC_B 5630,4710 r180 top (schematic designator C3)
C3_H "0.1uF" FP-CC0603-DA-IPC_B 5630,5410 r180 top (schematic designator C3)
C4_A "10 uF" FP-GRM188-0_2-IPC_C 5810,510 r0 top (schematic designator C4)
C4_B "10 uF" FP-GRM188-0_2-IPC_C 5810,1210 r0 top (schematic designator C4)
C4_C "10 uF" FP-GRM188-0_2-IPC_C 5810,1910 r0 top (schematic designator C4)
C4_D "10 uF" FP-GRM188-0_2-IPC_C 5810,2610 r0 top (schematic designator C4)
C4_E "10 uF" FP-GRM188-0_2-IPC_C 5810,3310 r0 top (schematic designator C4)
C4_F "10 uF" FP-GRM188-0_2-IPC_C 5810,4010 r0 top (schematic designator C4)
C4_G "10 uF" FP-GRM188-0_2-IPC_C 5810,4710 r0 top (schematic designator C4)
C4_H "10 uF" FP-GRM188-0_2-IPC_C 5810,5410 r0 top (schematic designator C4)
C5 "10 uF" FP-GRM188-0_2-IPC_C 1955.81,5270.81 r0 top
C6 "0.1uF" FP-CC0603-DA-IPC_B 1764.16,5272.51 r180 top
C7 "22uF" FP-GRM21B-0_2-e0_2_0_7-IPC_A 846.45,5670 r0 top
C8 "1uF" FP-CC0603-DA-IPC_B 836.65,5360 r0 top
C9 "0.1uF" FP-CC0603-DA-IPC_B 836.65,5510 r0 top
J1_A "217183-0001" FP-217183-0001-MFG 5781.81,810 r90 top locked (schematic designator J1)
J1_B "217183-0001" FP-217183-0001-MFG 5781.81,1510 r90 top locked (schematic designator J1)
J1_C "217183-0001" FP-217183-0001-MFG 5781.81,2210 r90 top locked (schematic designator J1)
J1_D "217183-0001" FP-217183-0001-MFG 5781.81,2910 r90 top locked (schematic designator J1)
J1_E "217183-0001" FP-217183-0001-MFG 5781.81,3610 r90 top locked (schematic designator J1)
J1_F "217183-0001" FP-217183-0001-MFG 5781.81,4310 r90 top locked (schematic designator J1)
J1_G "217183-0001" FP-217183-0001-MFG 5781.81,5010 r90 top locked (schematic designator J1)
J1_H "217183-0001" FP-217183-0001-MFG 5781.81,5710 r90 top locked (schematic designator J1)
J2 "BTE-040-01-F-D-A" SAMTEC_BTE-040-01-F-D-A 2152.64,4037.32 r0 top locked
J3 "SSW-120-01-F-D" SAMTEC_SSW-120-01-F-D 275,5000 r180 top locked
J4 "SSW-120-01-F-D" SAMTEC_SSW-120-01-F-D 2500,5000 r180 top
J5 "SSW-120-01-F-D" SAMTEC_SSW-120-01-F-D 275,1500 r180 top locked
J6 "SSW-120-01-F-D" SAMTEC_SSW-120-01-F-D 2500,1500 r180 top locked
J7 "BTE-040-01-F-D-A" SAMTEC_BTE-040-01-F-D-A 2152.64,2462.52 r0 top locked
J8 "TSW-102-07-F-S" FP-TSW-102-07-F-S-MFG 1911.49,6002.67 r180 top
J9 "TSW-103-07-F-S" SMTC-TSW-103-07-X-S 1761.49,5442.67 r0 top
J10 "PJ-102AH" CUI_PJ-102AH 300,5540 r180 top
R2 "0R" FP-RC0603-MFG 1761.49,5697.67 r90 top
R3 "10K0" FP-RC0603-0_55-IPC_B 2877.82,5268.61 r270 top
R4 "10K0" FP-RC0603-0_55-IPC_B 3007.82,5267.6 r270 top
R5 "10K0" FP-RC0603-0_55-IPC_B 3007.82,6037.6 r90 top
R6 "10K0" FP-RC0603-0_55-IPC_B 2877.82,6038.61 r90 top
S1 "DS04-254-2-04BK-SMT-TR" SW_DS04-254-2-04BK-SMT-TR 3057.82,5647.6 r0 top
U1_A "SN65LVDT41PW" FP-PW0020A-IPC_C 5070,756.12 r180 top (schematic designator U1)
U1_B "SN65LVDT41PW" FP-PW0020A-IPC_C 5070,1456.12 r180 top locked (schematic designator U1)
U1_C "SN65LVDT41PW" FP-PW0020A-IPC_C 5070,2156.12 r180 top locked (schematic designator U1)
U1_D "SN65LVDT41PW" FP-PW0020A-IPC_C 5070,2856.12 r180 top locked (schematic designator U1)
U1_E "SN65LVDT41PW" FP-PW0020A-IPC_C 5070,3556.12 r180 top locked (schematic designator U1)
U1_F "SN65LVDT41PW" FP-PW0020A-IPC_C 5070,4256.12 r180 top locked (schematic designator U1)
U1_G "SN65LVDT41PW" FP-PW0020A-IPC_C 5070,4956.12 r180 top locked (schematic designator U1)
U1_H "SN65LVDT41PW" FP-PW0020A-IPC_C 5070,5656.12 r180 top locked (schematic designator U1)

## Footprints (in the part's own frame and the unit in brackets; to place one, negate y for a bottom-side part, rotate by r counter-clockwise, add the part's x,y. Pads: shape width x height; smd on the part's side, far side on the other; paste and mask are expansions set on the pad)
CUI_PJ-102AH [mm]
  oval 1.508x3.016 hole 1 square: 1(-6.5,0) 2(-0.5,0)
  oval 3.016x1.508 hole 1 square: 3(-3.5,4.7)
  silkscreen extent -8.3,-4.5 7.2,4.5
FP-217183-0001-MFG [mm]
  rrect100% 0.9x1.5 hole 1.1 slot 0.5 at 0 deg paste+0 mask+0: 1(-4.13,1.985) 2(4.13,1.985) 3(-4.49,-2.405) 4(4.49,-2.405)
  rect 0.3x0.9 smd paste+0 mask+0: A1(-2.75,3.795) A2(-2.25,3.795) A3(-1.75,3.795) A4(-1.25,3.795) A5(-0.75,3.795) A6(-0.25,3.795) A7(0.25,3.795) A8(0.75,3.795) A9(1.25,3.795) A10(1.75,3.795) A11(2.25,3.795) A12(2.75,3.795)
  round 0.65 hole 0.4 paste+0 mask+0: B1(2.8,2.585) B2(2.4,1.885) B3(1.6,1.885) B4(1.2,2.585) B5(0.8,1.885) B6(0.4,2.585) B7(-0.4,2.585) B8(-0.8,1.885) B9(-1.2,2.585) B10(-1.6,1.885) B11(-2.4,1.885) B12(-2.8,2.585)
  round 0.65 hole 0.65 unplated paste+0 mask+0: ""(-3.6,3.235)
  rrect100% 0.95x0.65 hole 0.65 slot 0.95 at 0 deg unplated paste+0 mask+0: ""(3.6,3.235)
  silkscreen extent -4.57,-1.28 4.57,5.71
FP-CC0603-DA-IPC_B [mil]
  rect 41.66x35.91 smd paste+0 mask+0: 1(-26.65,0) 2(26.65,0)
  silkscreen extent -47,-34 47,34
FP-CL10-IPC_A [mil]
  rect 45.6x39.85 smd paste+0 mask+0: 1(-32.56,0) 2(32.56,0)
  silkscreen extent -55,-36 55,36
FP-GRM21B-0_2-e0_2_0_7-IPC_A [mil]
  rect 57.27x61.27 smd paste+0 mask+0: 1(-36.45,0) 2(36.45,0)
  silkscreen extent -65,-46 65,46
FP-GRM188-0_2-IPC_C [mil]
  rect 35.63x35.68 smd paste+0 mask+0: 1(-23.64,0) 2(23.64,0)
  silkscreen extent -41,-35 41,35
FP-PW0020A-IPC_C [mm]
  rect 1.355x0.341 smd paste+0 mask+0: 1(-2.775,2.925)
  rrect100% 1.355x0.341 smd paste+0 mask+0: 2(-2.775,2.275) 3(-2.775,1.625) 4(-2.775,0.975) 5(-2.775,0.325) 6(-2.775,-0.325) 7(-2.775,-0.975) 8(-2.775,-1.625) 9(-2.775,-2.275) 10(-2.775,-2.925) 11(2.775,-2.925) 12(2.775,-2.275) 13(2.775,-1.625) 14(2.775,-0.975) 15(2.775,-0.325) 16(2.775,0.325) 17(2.775,0.975) 18(2.775,1.625) 19(2.775,2.275) 20(2.775,2.925)
  silkscreen extent -4.15,-3.25 1.6,3.25
FP-RC0603-0_55-IPC_B [mil]
  rect 33.81x35.91 smd paste+0 mask+0: 1(-30.58,0) 2(30.58,0)
  silkscreen extent -47,-34 47,34
FP-RC0603-MFG [mm]
  rect 0.9x0.8 smd paste+0 mask+0: 1(-0.85,0) 2(0.85,0)
  silkscreen extent -0.03,-0.45 0.03,0.45
FP-TSW-102-07-F-S-MFG [mm]
  rect 1.57x1.57 hole 1.02 paste+0 mask+0: 1(-1.27,0)
  round 1.57 hole 1.02 paste+0 mask+0: 2(1.27,0)
  silkscreen extent -3.3,-1.34 2.73,1.34
SAMTEC_BTE-040-01-F-D-A [mm]
  rect 0.457x1.44 smd: 01(-15.6,3.086) 02(-15.6,-3.086) 03(-14.8,3.086) 04(-14.8,-3.086) 05(-14,3.086) 06(-14,-3.086) 07(-13.2,3.086) 08(-13.2,-3.086) 09(-12.4,3.086) 10(-12.4,-3.086) 11(-11.6,3.086) 12(-11.6,-3.086) 13(-10.8,3.086) 14(-10.8,-3.086) 15(-10,3.086) 16(-10,-3.086) 17(-9.2,3.086) 18(-9.2,-3.086) 19(-8.4,3.086) 20(-8.4,-3.086) 21(-7.6,3.086) 22(-7.6,-3.086) 23(-6.8,3.086) 24(-6.8,-3.086) 25(-6,3.086) 26(-6,-3.086) 27(-5.2,3.086) 28(-5.2,-3.086) 29(-4.4,3.086) 30(-4.4,-3.086) 31(-3.6,3.086) 32(-3.6,-3.086) 33(-2.8,3.086) 34(-2.8,-3.086) 35(-2,3.086) 36(-2,-3.086) 37(-1.2,3.086) 38(-1.2,-3.086) 39(-0.4,3.086) 40(-0.4,-3.086) 41(0.4,3.086) 42(0.4,-3.086) 43(1.2,3.086) 44(1.2,-3.086) 45(2,3.086) 46(2,-3.086) 47(2.8,3.086) 48(2.8,-3.086) 49(3.6,3.086) 50(3.6,-3.086) 51(4.4,3.086) 52(4.4,-3.086) 53(5.2,3.086) 54(5.2,-3.086) 55(6,3.086) 56(6,-3.086) 57(6.8,3.086) 58(6.8,-3.086) 59(7.6,3.086) 60(7.6,-3.086) 61(8.4,3.086) 62(8.4,-3.086) 63(9.2,3.086) 64(9.2,-3.086) 65(10,3.086) 66(10,-3.086) 67(10.8,3.086) 68(10.8,-3.086) 69(11.6,3.086) 70(11.6,-3.086) 71(12.4,3.086) 72(12.4,-3.086) 73(13.2,3.086) 74(13.2,-3.086) 75(14,3.086) 76(14,-3.086) 77(14.8,3.086) 78(14.8,-3.086) 79(15.6,3.086) 80(15.6,-3.086)
  round 1.016 hole 1.016 unplated: ""(-17.238,2.032) ""(17.238,2.032)
  silkscreen extent -18.75,-3.19 18,3.19
SAMTEC_SSW-120-01-F-D [mm]
  rect 1.39x1.39 hole 1.04: 01(0,0)
  round 1.39 hole 1.04: 02(0,2.54) 03(-2.54,0) 04(-2.54,2.54) 05(-5.08,0) 06(-5.08,2.54) 07(-7.62,0) 08(-7.62,2.54) 09(-10.16,0) 10(-10.16,2.54) 11(-12.7,0) 12(-12.7,2.54) 13(-15.24,0) 14(-15.24,2.54) 15(-17.78,0) 16(-17.78,2.54) 17(-20.32,0) 18(-20.32,2.54) 19(-22.86,0) 20(-22.86,2.54) 21(-25.4,0) 22(-25.4,2.54) 23(-27.94,0) 24(-27.94,2.54) 25(-30.48,0) 26(-30.48,2.54) 27(-33.02,0) 28(-33.02,2.54) 29(-35.56,0) 30(-35.56,2.54) 31(-38.1,0) 32(-38.1,2.54) 33(-40.64,0) 34(-40.64,2.54) 35(-43.18,0) 36(-43.18,2.54) 37(-45.72,0) 38(-45.72,2.54) 39(-48.26,0) 40(-48.26,2.54)
  silkscreen extent -49.79,-1.21 2.27,3.75
SMTC-TSW-103-07-X-S [mm] ".025 SQ Post Terminal Strip Assembly, 1x3 Pins, Vertical, 2.54mm Pitch, Male"
  rect 1.55x1.55 hole 1.02: 1(0,0)
  round 1.55 hole 1.02: 2(2.54,0) 3(5.08,0)
  silkscreen extent -1.46,-1.27 6.54,1.27
SW_DS04-254-2-04BK-SMT-TR [mm]
  rect 1.5x1.1 smd: 1A(-4.45,3.81) 1B(4.45,3.81) 2A(-4.45,1.27) 2B(4.45,1.27) 3A(-4.45,-1.27) 3B(4.45,-1.27) 4A(-4.45,-3.81) 4B(4.45,-3.81)
  silkscreen extent -5.85,-5.58 3.1,5.58

## Part data
C1_A C1_B C1_C C1_D C1_E C1_F C1_G C1_H C3_A C3_B C3_C C3_D C3_E C3_F C3_G C3_H C6 C9: library part CAP_0U10_0603, "CAP CER 0.1UF 50V X7R 0603"
C2_A C2_B C2_C C2_D C2_E C2_F C2_G C2_H: library part CAP_1N00_0603, "Cap Ceramic 1nF 50V X7R ±10% Pad SMD 0603 +125°C T/R"
C4_A C4_B C4_C C4_D C4_E C4_F C4_G C4_H C5: library part CAP_10U0_0603, "Chip Multilayer Ceramic Capacitors for General Purpose, 0603, 10uF, X7R, 15%, 10%, 10V"
C7: library part CAP_22U0_0805, "Chip Multilayer Ceramic Capacitors for General Purpose, 0805, 22uF, X6S, 22%, 20%, 16V"
C8: library part CAP_1U00_0603, "CAP CER 1UF 16V X7R 0603"
J1_A J1_B J1_C J1_D J1_E J1_F J1_G J1_H: library part CON_USBC_TH_SMT, "USB-C (USB TYPE-C) USB 3.2 Gen 1 (USB 3.1 Gen 1, Superspeed (USB 3.0)) Receptacle Connector 24 Position Through Hole, Right Angle"
J2 J7: library part CON_FPGA_SMD, "80 Position Connector Header, Outer Shroud Contacts Surface Mount Gold"
J3 J4 J5 J6: library part CON_HEADF_2X20, "40 Position Receptacle Connector 0.100\" (2.54mm) Through Hole Gold"
J8: library part CON_HEADM_1X2, "Connector Header Through Hole 2 position 0.100\" (2.54mm)"
J9: library part CON_HEADM_1X3, "0.025\" SQ Post Header, Through-hole, Vertical, -55 to 125 degC, 2.54 mm Pitch, 3-Pin, Male, RoHS"
J10: library part CON_PWR_24V_5A, "Power Barrel Connector Jack 2.00mm ID (0.079\"), 5.50mm OD (0.217\") Through Hole, Right Angle"
R2: library part RES_0R00_0603, "RES SMD 0 OHM JUMPER 1/10W 0603"
R3 R4 R5 R6: library part RES_10K0_0603, "RES 10K OHM 1% 1/10W 0603"
S1: library part SW_DIP_4_SMT, "Dip Switch SPST 4 Position Surface Mount Slide (Standard) Actuator 25mA 24VDC"
U1_A U1_B U1_C U1_D U1_E U1_F U1_G U1_H: library part CMP-04872-000210-1, "IC TRANSCEIVER HALF 4/1 20TSSOP"

## Free pads (board coordinates)
  round 196.85 hole 98.43: MH(250,250) MH(250,6250) MH(321.73,2383.86) MH(321.73,4116.14) MH(3038.27,2383.86) MH(3038.27,4116.14) MH(5730,250) MH(5730,6250)

## Via types
v1: diameter 20, hole 8, Top to Bottom, 190 vias
v2: diameter 24, hole 12, Top to Bottom, 154 vias
v3: diameter 32, hole 16, Top to Bottom, 38 vias

## Nets (pads, with @x,y where several pads share a name; then routed paths per layer and width w, separated by ;. In a path a pad name is that pad's centre, name@x,y a point inside that pad or via, vN(x,y) a via of type N, cw(c..) or ccw(c..) an arc to the next point about the centre after c; other vN are vias at no path point)
1V0: J2.04 J2.06 J3.04 J3.06 | length 2011.7
  Top w12: J2.04@1569.96,3915.83 J2.06@1601.46,3915.83 ; v2(1570,3790) J2.04@1569.96,3915.83
  Bottom w12: J3.06@475,4900 J3.04@375,4900 375,4730 1315,3790 v2(1570,3790)
1V8: J2.07 J3.07 | length 1542.4
  Top w12: J3.07@575,5000 630,4945 630,4851.02 1071.02,4410 1520,4410 1632.95,4297.05 J2.07@1632.95,4158.82
3V3: C1_A.1 C1_B.1 C1_C.1 C1_D.1 C1_E.1 C1_F.1 C1_G.1 C1_H.1 C2_A.2 C2_B.2 C2_C.2 C2_D.2 C2_E.2 C2_F.2 C2_G.2 C2_H.2 C3_A.1 C3_B.1 C3_C.1 C3_D.1 C3_E.1 C3_F.1 C3_G.1 C3_H.1 C4_A.1 C4_B.1 C4_C.1 C4_D.1 C4_E.1 C4_F.1 C4_G.1 C4_H.1 J1_A.A4 J1_A.A9 J1_A.B4 J1_A.B9 J1_B.A4 J1_B.A9 J1_B.B4 J1_B.B9 J1_C.A4 J1_C.A9 J1_C.B4 J1_C.B9 J1_D.A4 J1_D.A9 J1_D.B4 J1_D.B9 J1_E.A4 J1_E.A9 J1_E.B4 J1_E.B9 J1_F.A4 J1_F.A9 J1_F.B4 J1_F.B9 J1_G.A4 J1_G.A9 J1_G.B4 J1_G.B9 J1_H.A4 J1_H.A9 J1_H.B4 J1_H.B9 J2.09 J2.11 J2.13 J3.09 J3.11 J3.13 J5.02 J5.04 J5.06 J7.02 J7.04 J7.06 R3.2 R4.2 R5.2 R6.2 U1_A.4 U1_A.8 U1_B.4 U1_B.8 U1_C.4 U1_C.8 U1_D.4 U1_D.8 U1_E.4 U1_E.8 U1_F.4 U1_F.8 U1_G.4 U1_G.8 U1_H.4 U1_H.8 | length 5056.5
  Top w10: J1_A.A4@5632.4,760.79 5633.31,761.69 5678.98,761.69 J1_A.B9@5680.04,762.76 ; J1_A.A9@5632.4,859.21 5633.31,858.31 5678.98,858.31 J1_A.B4@5680.04,857.24 ; J1_B.A4@5633.31,1461.69 J1_B.B9@5678.98,1461.69 ; J1_B.A9@5633.31,1558.31 J1_B.B4@5678.98,1558.31 ; J1_C.A4@5633.31,2161.69 J1_C.B9@5678.98,2161.69 ; J1_C.A9@5633.31,2258.31 J1_C.B4@5678.98,2258.31 ; J1_D.A4@5633.31,2861.69 J1_D.B9@5678.98,2861.69 ; J1_D.A9@5633.31,2958.31 J1_D.B4@5678.98,2958.31 ; J1_E.A4@5633.31,3561.69 J1_E.B9@5678.98,3561.69 ; J1_E.A9@5633.31,3658.31 J1_E.B4@5678.98,3658.31 ; J1_F.A4@5633.31,4261.69 J1_F.B9@5678.98,4261.69 ; J1_F.A9@5633.31,4358.31 J1_F.B4@5678.98,4358.31 ; J1_G.A4@5633.31,4961.69 J1_G.B9@5678.98,4961.69 ; J1_G.A9@5633.31,5058.31 J1_G.B4@5678.98,5058.31 ; J1_H.A4@5633.31,5661.69 J1_H.B9@5678.98,5661.69 ; J1_H.A9@5633.31,5758.31 J1_H.B4@5678.98,5758.31
  Top w12: J2.09@1664.45,4158.82 v2(1664.45,4253.07) ; J2.11@1695.95,4158.82 v2(1695.95,4290) ; J2.13@1727.44,4158.82 v2(1727.44,4253.07) ; v2(2750,6068.18) 2750.51,6068.69 2877.31,6068.69 R6.2@2877.82,6069.19 ; v2(2760,5238.04) R3.2@2877.82,5238.04 ; R4.2@3007.82,5237.02 v2(3120,5237.02) ; R5.2@3007.82,6068.18 3009.07,6069.43 3148.75,6069.43 v2(3150,6070.68) ; v2(4880,940) C2_A.2@4880,1017.44 ; v2(4880,1640) C2_B.2@4880,1717.44 ; v2(4880,2340) C2_C.2@4880,2417.44 ; v2(4880,3040) C2_D.2@4880,3117.44 ; v2(4880,3740) C2_E.2@4880,3817.44 ; v2(4880,4441.21) C2_F.2@4880,4517.44 ; v2(4880,5140) C2_G.2@4880,5217.44 ; v2(4880,5840) C2_H.2@4880,5917.44 ; C1_A.1@5040,1023.35 5043.35,1020 v2(5130,1020) ; C1_B.1@5040,1723.35 5043.35,1720 v2(5130,1720) ; C1_C.1@5040,2423.35 5043.35,2420 v2(5130,2420) ; C1_D.1@5040,3123.35 5043.35,3120 v2(5130,3120) ; C1_E.1@5040,3823.35 5043.35,3820 v2(5130,3820) ; C1_F.1@5040,4523.35 5043.35,4520 v2(5130,4520) ; C1_G.1@5040,5223.35 5043.35,5220 v2(5130,5220) ; C1_H.1@5040,5923.35 5043.35,5920 v2(5130,5920) ; U1_A.4@5179.27,717.73 v2(5238.68,717.73) ; U1_A.8@5179.27,820.09 5179.54,819.82 5238.68,819.82 v2(5240,818.5) ; U1_B.4@5179.27,1417.73 v2(5238.68,1417.73) ; U1_B.8@5179.27,1520.09 5179.54,1519.82 5238.68,1519.82 v2(5240,1518.5) ; U1_C.4@5179.27,2117.73 v2(5238.68,2117.73) ; U1_C.8@5179.27,2220.09 5179.54,2219.82 5238.68,2219.82 v2(5240,2218.5) ; U1_D.4@5179.27,2817.73 v2(5238.68,2817.73) ; U1_D.8@5179.27,2920.09 5179.54,2919.82 5238.68,2919.82 v2(5240,2918.5) ; U1_E.4@5179.27,3517.73 v2(5238.68,3517.73) ; U1_E.8@5179.27,3620.09 5179.54,3619.82 5238.68,3619.82 v2(5240,3618.5) ; U1_F.4@5179.27,4217.73 v2(5238.68,4217.73) ; U1_F.8@5179.27,4320.09 5179.54,4319.82 5238.68,4319.82 v2(5240,4318.5) ; U1_G.4@5179.27,4917.73 v2(5238.68,4917.73) ; U1_G.8@5179.27,5020.09 5179.54,5019.82 5238.68,5019.82 v2(5240,5018.5) ; U1_H.4@5179.27,5617.73 v2(5238.68,5617.73) ; U1_H.8@5179.27,5720.09 5179.54,5719.82 5238.68,5719.82 v2(5240,5718.5) ; C3_A.1@5659.96,510 5660,509.96 v2(5660,440) ; C3_B.1@5659.96,1210 5660,1209.96 v2(5660,1140) ; C3_C.1@5659.96,1910 5660,1909.96 v2(5660,1840) ; C3_D.1@5659.96,2610 5660,2609.96 v2(5660,2540) ; C3_E.1@5659.96,3310 5660,3309.96 v2(5660,3240) ; C3_F.1@5659.96,4010 5660,4009.96 v2(5660,3940) ; C3_G.1@5659.96,4710 5660,4709.96 v2(5660,4640) ; C3_H.1@5659.96,5410 5660,5409.96 v2(5660,5340) ; C4_A.1@5787.27,510 5787.31,509.96 v2(5787.31,440) ; C4_B.1@5787.27,1210 5787.31,1209.96 v2(5787.31,1140) ; C4_C.1@5787.27,1910 5787.31,1909.96 v2(5787.31,1840) ; C4_D.1@5787.27,2610 5787.31,2609.96 v2(5787.31,2540) ; C4_E.1@5787.27,3310 5787.31,3309.96 v2(5787.31,3240) ; C4_F.1@5787.27,4010 5787.31,4009.96 v2(5787.31,3940) ; C4_G.1@5787.27,4710 5787.31,4709.96 v2(5787.31,4640) ; C4_H.1@5787.27,5410 5787.31,5409.96 v2(5787.31,5340)
  Top w16: J7.02@1538.46,2341.02 J7.04@1569.96,2341.02 J7.06@1601.46,2341.02
  other v3: 1533.46,2222.99 1575,2265.72
5V0: C5.1 C6.1 C7.1 C8.1 C9.1 J2.01 J2.03 J2.05 J3.01 J3.03 J3.05 J9.2 J10.1 | length 63
  Top w16: J2.01@1538.46,4158.82 J2.03@1569.96,4158.82 J2.05@1601.46,4158.82
board_mode_0: J2.32 J3.32 R3.1 S1.4A | length 2857.3
  Top w8: v2(2010.91,3840) J2.32@2010.91,3915.83 ; v1(2490,5500) 2880.22,5500 S1.4A@2882.62,5497.6 2882.62,5304 R3.1@2877.82,5299.19
  Bottom w8: v2(2010.91,3840) 2010.91,4165.79 1975.85,4200.85 1975.85,4699.15 J3.32@1775,4900 1821.93,4946.93 1821.93,5060 1901.93,5140 2130,5140 v1(2490,5500)
board_mode_1: J2.34 J3.34 R4.1 S1.3A | length 3047.6
  Top w8: v2(2042.4,3800) J2.34@2042.4,3915.83 ; v1(2560,5597.6) S1.3A@2882.62,5597.6 ; S1.3A@2890.49,5597.6 3007.82,5480.28 R4.1@3007.82,5298.18
  Bottom w8: v2(2042.4,3800) 2042.4,4175.2 2010.91,4206.69 2010.91,4764.09 J3.34@1875,4900 1920,4945 1920,5038.51 1981.49,5100 2170,5100 2560,5490 v1(2560,5597.6)
board_mode_2: J2.38 J3.38 R5.1 S1.2A | length 2898
  Top w8: v2(2105.39,3800) J2.38@2105.39,3915.83 ; v1(2650,5697.6) S1.2A@2882.62,5697.6 ; S1.2A@2890.49,5697.6 3007.82,5814.92 R5.1@3007.82,6007.02
  Bottom w8: v2(2105.39,3800) 2105.39,4868.6 2075,4899 J3.38@2075,4900 2120,4945 2120,5020 2170,5070 2243.76,5070 2650,5476.24 v1(2650,5697.6)
board_mode_3: J2.40 J3.40 R6.1 S1.1A | length 2644.1
  Top w8: v2(2136.89,3840) J2.40@2136.89,3915.83 ; v1(2730,5797.6) S1.1A@2882.62,5797.6 2882.62,6003.23 R6.1@2877.82,6008.04
  Bottom w8: v2(2136.89,3840) 2136.89,4861.89 J3.40@2175,4900 2730,5455 v1(2730,5797.6)
C\S\_A: J7.16 U1_A.1 | length 4741.1
  Top w8: J7.16@1758.94,2341.02 1758.94,2151.06 2290,1620 4416.17,1620 4520,1516.17 4520,999.51 v1(4880,639.51) ; U1_A.1@5179.27,640.96 v1(5280,640.96)
  Bottom w8: v1(4880,639.51) 4880.73,640.23 5279.27,640.23 v1(5280,640.96)